# EAGLE board nano3-1 (EAGLE 7.1.0)
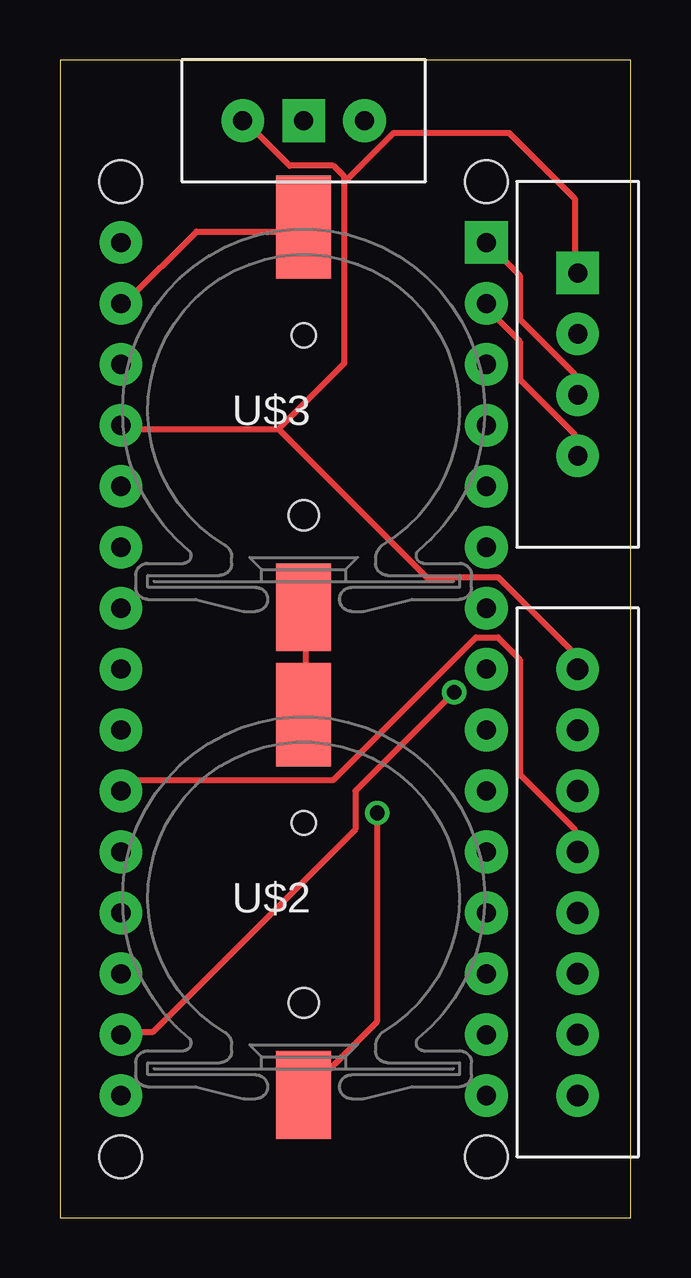
[diagram p0: board, top side]
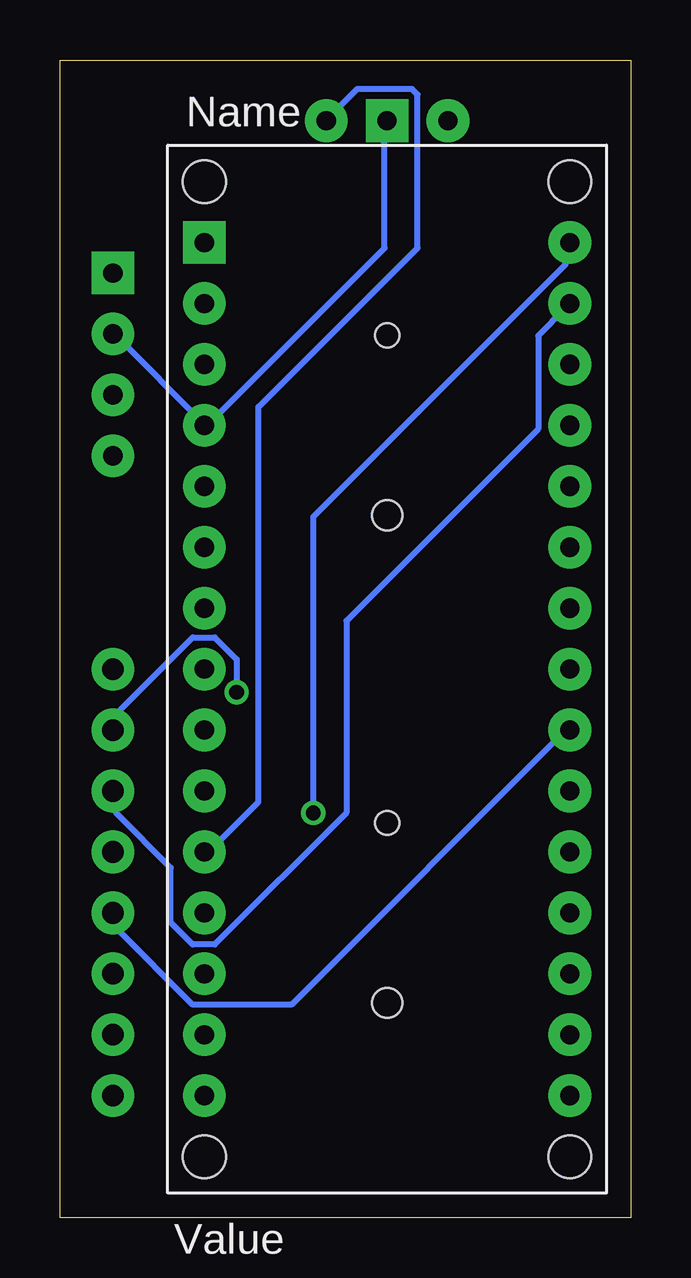
[diagram p1: board, bottom side, seen from below]

Size 23.8 x 48.25 mm. Coordinates in mm from the lower left corner, seen from the top.
Outline: 0,0 23.8,0 23.8,48.25 0,48.25 0,0
Copper layers (1*16): Top 0.035mm / dielectric 1.5mm / Bottom 0.035mm
Design rules "default": minimum track width 10mil, minimum drill 24mil, track to track 8mil, track to pad 8mil, pad to pad 8mil, via to via 8mil, smd to smd 8mil, copper to edge 40mil, drill to drill 8mil, minimum pad ring 10mil, minimum via ring 8mil, stop-mask expansion 4mil, vias tented up to drill 0mil, thermal gap 10mil

## Footprints (pad centres in the part's own frame; a part is rotated, then mirrored left to right if it is on the bottom)
PDIP-32 = drill 0.8 pad 1.778: 3V3 15.24,-35.56; +5V 15.24,-10.16; A0 15.24,-12.7; A1 15.24,-15.24; A2 15.24,-17.78; A3 15.24,-20.32; A4 15.24,-22.86; A5 15.24,-25.4; A6 15.24,-27.94; A7 15.24,-30.48; AREF 15.24,-33.02; D0/RX 0,-5.08; D2 0,-12.7; D3 0,-15.24; D4 0,-17.78; D5 0,-20.32; D6 0,-22.86; D7 0,-25.4; D8 0,-27.94; D9 0,-30.48; D10 0,-33.02; D11 0,-35.56; D12 0,-38.1; D13 15.24,-38.1; GND 0,-10.16; GND1 15.24,-5.08; RESET 0,-7.62; RESET1 15.24,-7.62; VIN 15.24,-2.54 | drill 0.8 pad 1.778 square: D1/TX 0,-2.54 | hole 1.778: 0,0; 0,-40.64; 15.24,-40.64; 15.24,0
HARWIN-CR1220 = smd 2.3 x 4.3: NEG 0,8.26 | smd 2.3 x 3.66: POS 0,-7.58 | hole 1: 0,3.75 | hole 1.25: 0,-3.75
GY85 = drill 0.9 pad 1.778: 3.3V 0,6.35; A_INT 0,-6.35; G_INT 0,-8.89; GND 0,3.81; M_DRDY 0,-3.81; SCL 0,1.27; SDA 0,-1.27; VCC_IN 0,8.89
HC06 = drill 0.8 pad 1.778: GND 0,-2.54; RXD 0,2.54; TXD 0,0 | drill 0.8 pad 1.778 square: VCC 0,-5.08
KEY_SMALL = drill 0.8 pad 1.778: DAT 0,-2.54; VCC 0,2.54 | drill 0.8 pad 1.778 square: GND 0,0

## Placement (x,y rotation side)
U$1  ARDUINONANO  [PDIP-32]  17.78,43.18 0 bottom
U$2  CR1220-HOLDER  [HARWIN-CR1220]  10.16,12.7 0 top
U$3  CR1220-HOLDER  [HARWIN-CR1220]  10.16,33.02 0 top
U$4  GY85  [GY85]  21.59,13.97 0 top
U$5  HC06  [HC06]  21.59,34.29 180 top
U$6  KEY_SMALL  [KEY_SMALL]  10.16,45.72 90 top

## Library data of the parts
U$1 = jet-lib
U$2 U$3 = battery-holder
U$4-U$6 = RMQLIFE

## Nets
N$1: U$1.+5V U$4.VCC_IN U$5.VCC U$6.VCC
N$2: U$1.VIN U$2.POS
N$3: U$1.GND1 U$3.NEG U$4.GND
N$4: U$1.3V3 U$4.3.3V
N$5: U$1.GND U$5.GND U$6.GND
N$6: U$1.D8 U$6.DAT
N$7: U$2.NEG U$3.POS
N$8: U$1.D1/TX U$5.TXD
N$9: U$1.D0/RX U$5.RXD
N$11: U$1.A5 U$4.SCL
N$12: U$1.A4 U$4.SDA

## Tracks (layer width: path | path; a pad name or v marks a point on that pad's centre or on a via)
N$1
  Top 0.254: 9.12,32.87 15.29,26.69 18.26,26.69 21.46,23.5 21.46,23.04 U$4.VCC_IN | 9.12,32.87 2.72,32.87 U$1.+5V | 11.86,43.16 11.86,35.61 9.12,32.87 | 11.86,43.16 11.86,43.38 11.41,43.84 9.58,43.84 7.75,45.67 U$6.VCC | 11.86,43.16 13.92,45.21 18.72,45.21 21.46,42.47 21.46,39.5 U$5.VCC
N$2  (via drill 0.61)
  Top 0.254: v13.23,16.87 13.23,8.18 10.26,5.21 U$2.POS
  Bottom 0.254: v13.23,16.87 13.23,29.21 2.72,39.73 2.72,40.64 U$1.VIN
N$3
  Top 0.254: U$3.NEG 10.03,41.1 5.69,41.1 2.72,38.12 U$1.GND1
  Bottom 0.254: U$4.GND 21.46,17.78 21.46,16.87 19.18,14.58 19.18,12.29 18.26,11.38 17.35,11.38 11.86,16.87 11.86,24.87 3.86,32.87 3.86,36.75 2.72,37.9 U$1.GND1
N$4  (via drill 0.61)
  Top 0.254: v16.43,21.89 12.32,17.78 12.32,16.18 3.86,7.72 2.72,7.72 U$1.3V3
  Bottom 0.254: v16.43,21.89 16.43,23.27 17.35,24.18 18.26,24.18 21.46,20.98 21.46,20.52 U$4.3.3V
N$5
  Bottom 0.254: U$6.GND 10.26,45.67 10.26,40.41 17.58,33.1 U$1.GND 17.8,33.1 21.46,36.75 U$5.GND
N$6
  Bottom 0.254: U$6.DAT 12.55,45.9 11.41,47.04 9.12,47.04 8.89,46.81 8.89,40.41 15.52,33.78 15.52,17.32 17.58,15.26 U$1.D8
N$7
  Top 0.254: U$3.POS 10.26,25.32 10.26,20.98 U$2.NEG
N$8
  Top 0.254: U$5.TXD 21.46,34.47 21.46,35.15 19.18,37.44 19.18,39.27 17.8,40.64 U$1.D1/TX
N$9
  Top 0.254: U$5.RXD 21.46,31.95 21.46,32.64 19.18,34.92 19.18,36.52 17.8,37.9 U$1.D0/RX
N$11
  Top 0.254: U$4.SCL 21.46,15.26 21.46,16.18 19.18,18.47 19.18,23.27 18.26,24.18 17.35,24.18 11.41,18.24 3.18,18.24 2.72,17.78 U$1.A5
N$12
  Bottom 0.254: U$4.SDA 21.46,12.52 21.46,12.06 18.26,8.86 14.15,8.86 2.72,20.29 U$1.A4